# Altium PCB PCB_国产飞控-led端子-copy-copy_2026-03-31.pcbdoc (part 3 of 3)
Units mil, origin at the board's own origin, x right, y up, seen from the top; angles counter-clockwise.
Board outline 3997.5 x 3500.13 mil, 2 copper layers (Top Layer, Bottom Layer); 108 components, 113 nets, 523 pads, 148 vias.
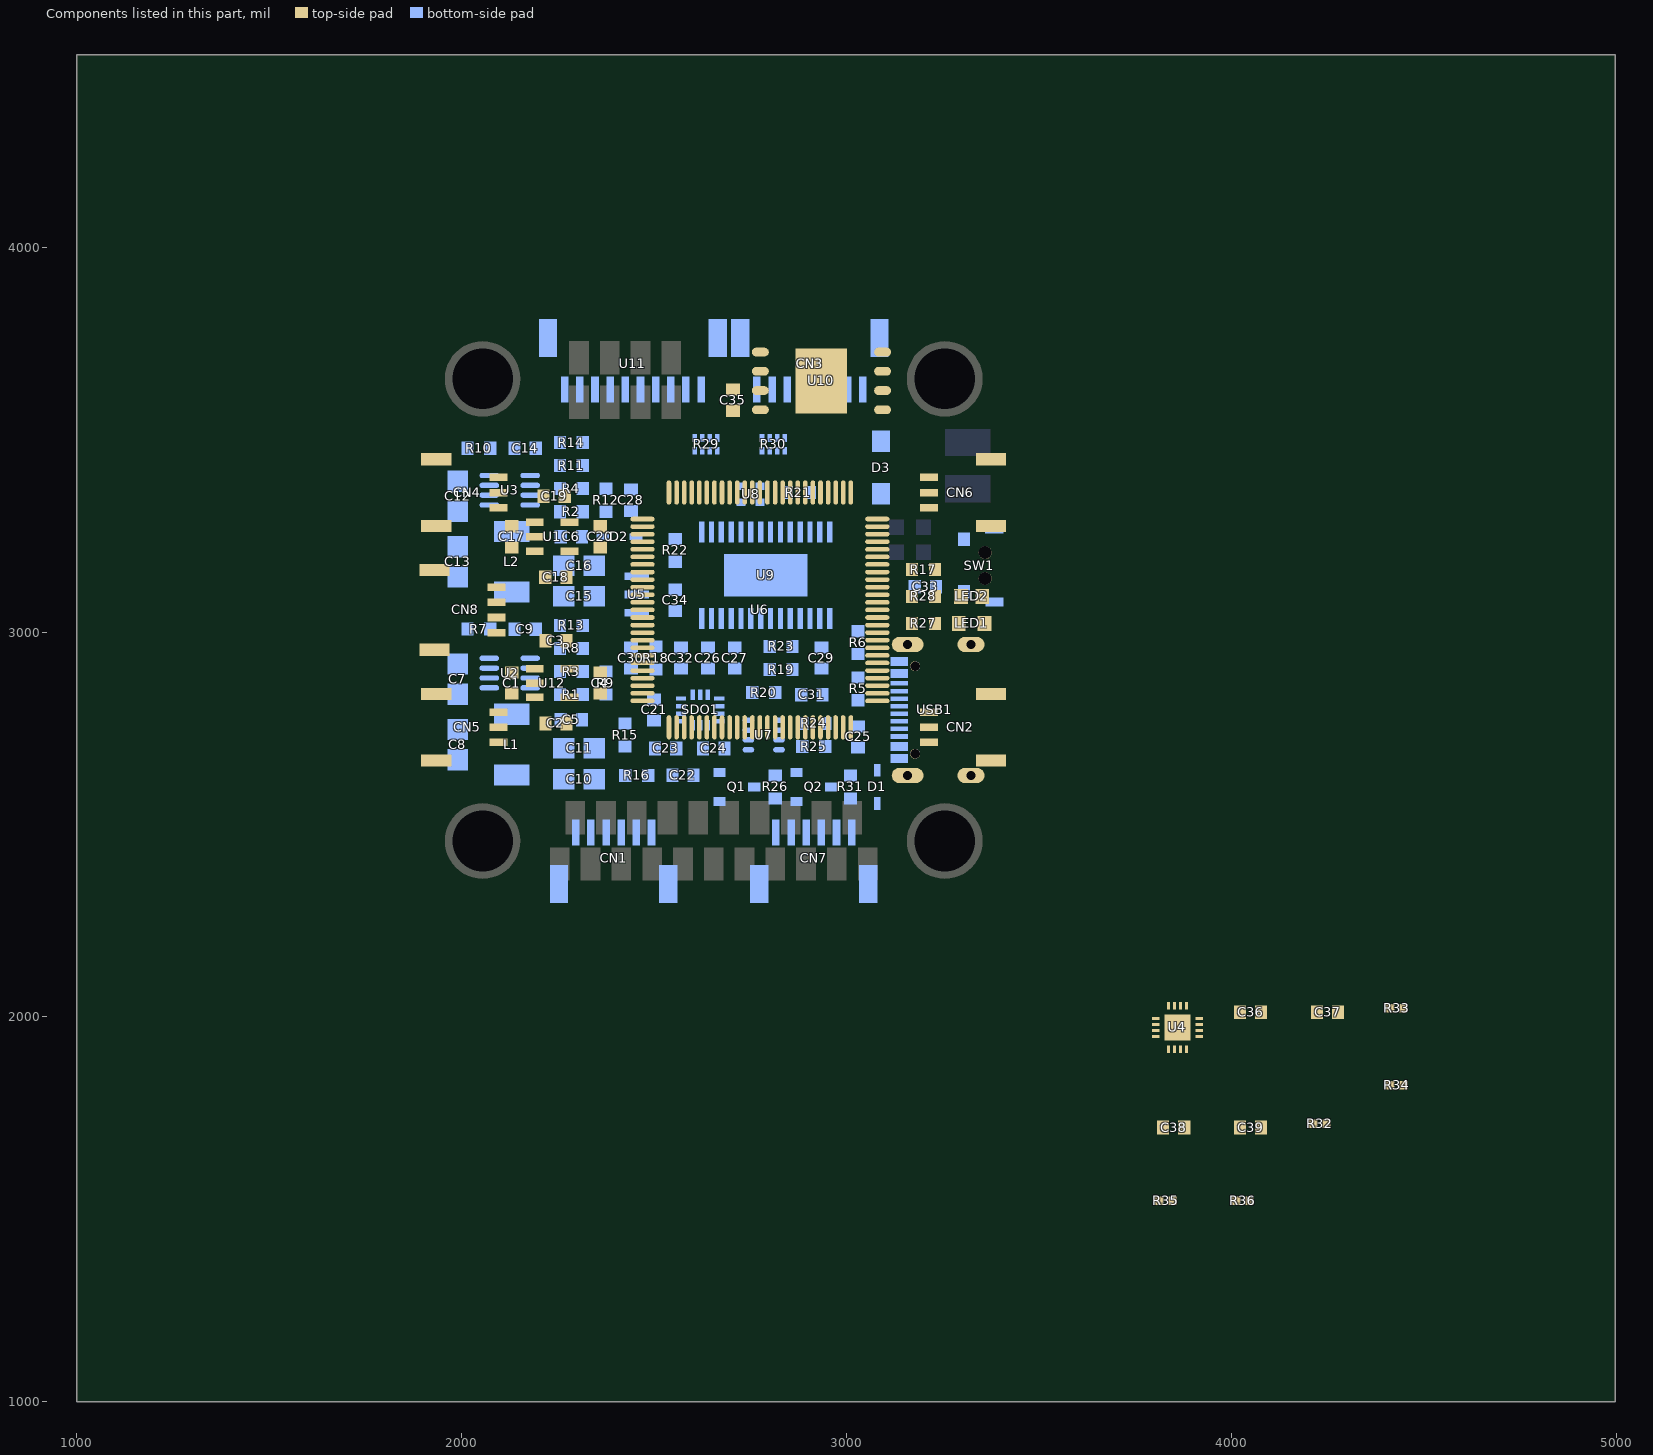
[diagram p3: the components of this part, seen from the top]

## Other copper (continued)
Mid-Layer 2:
  region net SERVO2: 2858.07,3418.48 2858.07,3436.78 2866.62,3432.63 2866.62,3422.63
  region net SERVO1: 2898.07,3458.48 2898.07,3476.78 2906.62,3472.63 2906.62,3462.63
  region net GYRO_EXTI1: 2695.85,2810.7 2714.15,2810.7 2710,2819.25 2700,2819.25
  region net GYRO_EXTI1: 2990.76,3295.45 2977.82,3308.39 2974.71,3299.42 2981.79,3292.34
  region net +10V: 2257.18,2556.87 2244.24,2569.81 2249.43,2573.2 2260.57,2562.06
  region net UART4_RX: 2415.76,2844.81 2402.82,2831.87 2399.71,2840.84 2406.79,2847.92
  region net UART4_RX: 2380.76,3440.45 2367.82,3453.39 2364.71,3444.42 2371.79,3437.34
  region net 3V3-IMU: 2482.18,2768.39 2469.24,2755.45 2478.21,2752.34 2485.29,2759.42
  region net SERVO2: 3037.18,3081.87 3024.24,3094.81 3033.21,3097.92 3040.29,3090.84
  region net SERVO1: 3130.76,3079.81 3117.82,3066.87 3114.71,3075.84 3121.79,3082.92
  region net UART1_RX: 3142.18,3163.39 3129.24,3150.45 3138.21,3147.34 3145.29,3154.42
  region net UART1_TX: 3025.76,3155.45 3012.82,3168.39 3009.71,3159.42 3016.79,3152.34
  region net VBAT_ADC: 2720.76,2629.81 2707.82,2616.87 2706.46,2624.09 2713.54,2631.17
  region net VBAT_ADC: 2462.18,2663.39 2449.24,2650.45 2458.21,2647.34 2465.29,2654.42
  region net CURRENT1: 2760.76,2679.81 2747.82,2666.87 2744.71,2675.84 2751.79,2682.92
  region net CURRENT1: 2298.07,3518.48 2298.07,3536.78 2306.62,3532.63 2306.62,3522.63
  region net +10V: 2248.07,3673.48 2248.07,3691.78 2255,3690.5 2255,3674.76
  region net VDD: 3190.85,3275.7 3209.15,3275.7 3205,3284.25 3195,3284.25
  region net VDD: 3120.85,3694.56 3139.15,3694.56 3135,3686.01 3125,3686.01
  region net LED: 2035.85,3274.56 2054.15,3274.56 2050,3266.01 2040,3266.01
  region net LED: 2035.85,2720.7 2054.15,2720.7 2050,2729.25 2040,2729.25
  region net +5V: 2535.85,3774.56 2554.15,3774.56 2552.87,3766.01 2537.13,3766.01
  region net +5V: 2590.85,3220.7 2609.15,3220.7 2607.87,3229.25 2592.13,3229.25
  region net +5V: 2155.85,2975.7 2174.15,2975.7 2172.87,2984.25 2157.13,2984.25
  region net +5V: 3030.23,3260.75 3011.93,3260.8 3016.06,3269.33 3026.14,3269.3
  region net +5V: 2213.25,3202.16 2231.55,3202.16 2230.27,3193.61 2214.53,3193.61
  region net 3V3-IMU: 2695.76,2679.81 2682.82,2666.87 2679.71,2675.84 2686.79,2682.92
  region net UART1_RX: 2765.85,2589.56 2784.15,2589.56 2780,2581.01 2770,2581.01
  region net UART1_TX: 2626.74,2514.29 2616.84,2529.69 2626.21,2530.92 2631.75,2522.3
  region net UART1_RX: 2707.18,2516.87 2694.24,2529.81 2703.21,2532.92 2710.29,2525.84
Bottom Layer:
  region net BOX_MOSI: 2933.07,3498.48 2933.07,3516.78 2941.62,3512.63 2941.62,3502.63
  region net BOX_MOSI: 2991.93,3498.48 2991.93,3516.78 2983.38,3512.63 2983.38,3502.63
  region net AT_CS: 2790.71,3296.2 2806.87,3304.8 2807.8,3295.62 2797.8,3290.3
  region net AT_CS: 2807.18,3306.87 2794.24,3319.81 2803.21,3322.92 2810.29,3315.84
  region net AT_SCK: 2915.76,3319.81 2902.82,3306.87 2899.71,3315.84 2906.79,3322.92
  region net AT_MISO: 2888.96,3299.34 2870.65,3299.78 2874.6,3291.14 2884.6,3290.9
  region net AT_MOSI: 2838.33,3298.71 2820.11,3300.48 2823.4,3291.57 2833.4,3290.61
  region net BOOT0: 3287.18,3163.39 3274.24,3150.45 3283.21,3147.34 3290.29,3154.42
  region net MOTOR4: 2595.85,3435.7 2614.15,3435.7 2610,3444.25 2600,3444.25
  region net MOTOR3: 2627.94,3429.47 2643.34,3439.37 2635.32,3444.38 2626.71,3438.84
  region net MOTOR2: 2675.76,3439.81 2662.82,3426.87 2659.71,3435.84 2666.79,3442.92
  region net MOTOR1: 2700.85,3435.7 2719.15,3435.7 2715,3442.63 2705,3442.63
  region net SERVO4: 2757.18,3426.87 2744.24,3439.81 2753.21,3442.92 2760.29,3435.84
  region net SERVO3: 2792.18,3426.87 2779.24,3439.81 2788.21,3442.92 2795.29,3435.84
  region net SERVO2: 2845.51,3438.98 2839.3,3421.75 2832.49,3428.06 2836.24,3438.46
  region net SERVO1: 2881.93,3458.48 2881.93,3476.78 2873.38,3472.63 2873.38,3462.63
  region net GYRO_MOSI: 2698.16,2879.69 2688.26,2864.29 2683.25,2872.3 2688.79,2880.92
  region net GYRO_SCK: 2608.7,2862.18 2626.16,2867.69 2625,2858.36 2615,2855.21
  region net GYRO_CS1: 2578.07,2843.48 2578.07,2861.78 2586.62,2857.63 2586.62,2847.63
  region net GYRO_MISO: 2660.85,2844.56 2679.15,2844.56 2675,2836.01 2665,2836.01
  region net GYRO_EXTI2: 2530.85,2864.56 2549.15,2864.56 2545,2856.01 2535,2856.01
  region net GYRO_EXTI1: 2695.85,2794.56 2714.15,2794.56 2710,2786.01 2700,2786.01
  region net D-: 2955.85,3159.56 2974.15,3159.56 2970,3151.01 2960,3151.01
  region net D+: 2980.85,3209.56 2999.15,3209.56 2995,3201.01 2985,3201.01
  region net BB: 2966.93,2588.48 2966.93,2606.78 2960.25,2602.63 2960.25,2592.63
  region net SBUS: 2667.18,2598.39 2654.24,2585.45 2663.21,2582.34 2670.29,2589.42
  region net SBUS: 2646.93,2588.48 2646.93,2606.78 2638.38,2602.63 2638.38,2592.63
  region net +10V: 2257.18,2558.39 2244.24,2545.45 2251.18,2540.31 2262.32,2551.45
  region net +10V: 2235.85,2565.7 2254.15,2565.7 2252.87,2574.25 2237.13,2574.25
  region net UART3_TX: 2415.76,2560.45 2402.82,2573.39 2399.71,2564.42 2406.79,2557.34
  region net UART3_RX: 2486.93,2563.48 2486.93,2581.78 2480,2577.63 2480,2567.63
  region net I2C_SCL: 2835.85,2794.56 2854.15,2794.56 2850,2786.01 2840,2786.01
  region net I2C_SDA: 2775.85,2794.56 2794.15,2794.56 2790,2786.01 2780,2786.01
  region net U6_37: 2735.85,2810.7 2754.15,2810.7 2750,2819.25 2740,2819.25
  region net VBAT: 1938.07,3393.48 1938.07,3411.78 1946.62,3414.44 1946.62,3390.82
  region net VBAT: 1936.3,3392.18 1918.84,3397.69 1913.19,3390.51 1936.81,3383.06
  region net VBAT: 1938.07,3212.88 1938.07,3231.18 1946.62,3233.84 1946.62,3210.22
  region net VBAT: 1936.3,3211.58 1918.84,3217.09 1913.19,3209.91 1936.81,3202.46
  region net VBAT: 1936.3,3232.48 1918.84,3226.97 1913.19,3234.15 1936.81,3241.6
  region net VBAT: 1937.18,2793.39 1924.24,2780.45 1928.4,2772.53 1945.1,2789.23
  region net VBAT: 1915.85,2800.7 1934.15,2800.7 1936.81,2809.25 1913.19,2809.25
  region net VBAT: 2297.18,3403.33 2284.17,3390.45 2291.09,3385.28 2302.29,3396.36
  region net VBAT: 2297.18,2866.93 2284.17,2879.81 2291.09,2884.98 2302.29,2873.9
  region net VBAT: 2383.07,2758.48 2383.07,2776.78 2391.62,2772.63 2391.62,2762.63
  region net +5V: 2773.07,2943.48 2773.07,2961.78 2781.62,2957.63 2781.62,2947.63
  region net +5V: 2765.76,2964.81 2752.82,2951.87 2749.71,2960.84 2756.79,2967.92
  region net HEXT_OUT: 2409.5,3039.97 2406.41,3058.01 2415.52,3055.43 2417.23,3045.43
  region net HEXT_IN: 2407.18,3131.87 2394.24,3144.81 2403.21,3147.92 2410.29,3140.84
  region net U6_14: 2423.07,2998.48 2423.07,3016.78 2431.62,3012.63 2431.62,3002.63
  region net OSD_OUT_VTX: 2862.18,2866.87 2849.24,2879.81 2856.16,2880.87 2863.24,2873.79
  region net UART4_RX: 2370.85,3460.7 2389.15,3460.7 2385,3469.25 2375,3469.25
  region net 3V3-IMU: 2478.07,2758.48 2478.07,2776.78 2486.62,2772.63 2486.62,2762.63
  region net VBAT_ADC: 2462.19,2663.24 2449.08,2650.46 2458.02,2647.24 2465.18,2654.22
  region net VBAT_ADC: 2450.61,2674.82 2437.83,2661.71 2434.61,2670.65 2441.59,2677.81
  region net CURRENT1: 2290.76,3539.81 2277.82,3526.87 2274.71,3535.84 2281.79,3542.92
  region net SWDCLK: 3167.18,3358.39 3154.24,3345.45 3161.46,3344.09 3168.54,3351.17
  region net +5V: 2400.85,3195.7 2419.15,3195.7 2417.87,3204.25 2402.13,3204.25
  region net UART4_RX: 2715.85,3495.7 2734.15,3495.7 2730,3504.25 2720,3504.25
  region net OSD_IN_CAM: 2545.85,3139.56 2564.15,3139.56 2560,3131.01 2550,3131.01
  region net OSD_IN_CAM: 2545.85,3155.7 2564.15,3155.7 2560,3164.25 2550,3164.25
  region net VDD: 3208.07,3258.48 3208.07,3276.78 3216.62,3272.63 3216.62,3262.63
  region net VDD: 3208.07,3258.48 3208.07,3276.78 3216.62,3272.63 3216.62,3262.63
  region net VDD: 2476.93,3353.48 2476.93,3371.78 2468.38,3367.63 2468.38,3357.63
  region net VDD: 3073.16,2739.69 3063.26,2724.29 3058.25,2732.3 3063.79,2740.92
  region net +5V: 2610.45,3206.33 2604.94,3223.79 2614.27,3222.63 2617.42,3212.63
  region net +5V: 2591.93,3203.48 2591.93,3221.78 2583.38,3219.52 2583.38,3205.74
  region net +5V: 3255.85,2744.56 3274.15,2744.56 3272.87,2736.01 3257.13,2736.01
  region net +5V: 3075.76,2505.45 3062.82,2518.39 3057.68,2511.45 3068.82,2500.31
  region net +5V: 3068.7,2528.08 3086.16,2522.57 3087.87,2530.99 3072.13,2535.96
  region net VDD: 2780.85,2689.56 2799.15,2689.56 2795,2682.63 2785,2682.63
  region net VDD: 2780.85,2705.7 2799.15,2705.7 2795,2714.25 2785,2714.25
  region net VDD: 2783.97,2687.02 2780.22,2704.94 2772.69,2699.23 2774.78,2689.23
  region net VDD: 2966.93,2863.48 2966.93,2881.78 2958.38,2877.63 2958.38,2867.63
  region net +5V: 3030.23,3260.75 3011.93,3260.8 3016.1,3269.33 3026.1,3269.3
  region net 3V3-IMU: 2695.76,2679.81 2682.82,2666.87 2679.71,2675.84 2686.79,2682.92
  region net VDD: 2530.85,2919.56 2549.15,2919.56 2545,2911.01 2535,2911.01
  region net BEEPER: 2987.18,2648.39 2974.24,2635.45 2983.21,2632.34 2990.29,2639.42
  region net UART1_RX: 2766.93,2588.48 2766.93,2606.78 2760.2,2602.63 2760.2,2592.63
  region net UART1_RX: 2787.18,2598.39 2774.24,2585.45 2783.21,2582.34 2790.29,2589.42
  region net UART1_TX: 2605.85,2509.56 2624.15,2509.56 2620,2501.01 2610,2501.01
  region net UART1_RX: 2685.85,2509.56 2704.15,2509.56 2700,2501.01 2690,2501.01
  region net I2C_SCL: 2864.34,2509.78 2846.04,2509.34 2850.39,2500.9 2860.39,2501.14
  region net I2C_SDA: 2783.07,2508.48 2783.07,2526.78 2791.62,2522.63 2791.62,2512.63
  region net VBAT: 3255.94,3458.18 3255.94,3527.08 3214.61,3506.41 3214.61,3478.85
  region net SWDCLK: 3180.31,3209.64 3197.99,3227.32 3182.08,3232.62 3175.01,3225.55
  region net VDD: 3219.69,3280.13 3219.69,3255.13 3220,3262.63 3220,3272.63
  region net VDD: 3219.69,3280.13 3219.69,3255.13 3220,3262.63 3220,3272.63
  region net UART1_TX: 2924.84,2446.09 2944.52,2446.09 2939.7,2431.09 2929.7,2431.09
  region net +5V: 3023.26,2459.84 3023.26,2499.21 3036.9,2487.4 3036.9,2471.66
  region net UART1_RX: 2897.64,2446.09 2885.47,2467.93 2879.01,2448.71 2884.07,2439.63
  region net I2C_SCL: 2865.79,2513.02 2846.1,2513.02 2850,2517.51 2860,2517.63
  region net I2C_SDA: 2806.73,2491.01 2818.58,2513.02 2805.09,2519.61 2800.14,2510.42
  region net R13_2: 2298.78,3000.62 2330.53,3000.62 2322.57,2977 2306.83,2977
  region net VBAT: 2407.99,2778.16 2407.99,2755.13 2392.99,2762.63 2392.99,2772.63
  region net VBAT_ADC: 2437.73,2687.1 2412.73,2687.1 2433.16,2672.1 2447.3,2672.1
  region net VDD: 2487.99,2915.43 2487.99,2890.43 2472.99,2897.93 2472.99,2907.93
  region net VDD: 2522.01,2890.43 2522.01,2915.43 2537.01,2907.93 2537.01,2897.93
  region net U6_14: 2487.99,2963.62 2508.33,2978.16 2490.53,2983.87 2482.28,2977.98
  region net U6_37: 2739.47,2825.62 2757.5,2825.62 2750,2810.62 2740,2810.62
  region net MOTOR4: 2611.38,3460.86 2599.57,3460.86 2600,3445.86 2610,3445.86
  region net MOTOR3: 2631.06,3460.86 2619.25,3460.86 2620.2,3447.43 2630.2,3447.43
  region net MOTOR2: 2650.75,3460.86 2638.94,3460.86 2639.8,3457.83 2649.8,3457.83
  region net MOTOR1: 2670.43,3480.74 2670.43,3460.86 2681.8,3465.83 2681.8,3475.83
  region net R29_8: 2599.57,3514.4 2599.57,3494.52 2584.57,3499.43 2584.57,3509.43
  region net R29_7: 2631.06,3514.4 2619.25,3514.4 2620.2,3517.43 2630.2,3517.43
  region net R29_6: 2650.75,3514.4 2638.94,3514.4 2639.8,3529.4 2649.8,3529.4
  region net R29_5: 2670.43,3514.4 2658.62,3514.4 2659.5,3529.4 2669.5,3529.4
  region net SERVO4: 2786.38,3460.86 2774.57,3468.42 2766.24,3455.94 2774.86,3450.42
  region net SERVO3: 2806.06,3460.86 2794.25,3460.86 2795.2,3447.83 2805.2,3447.83
  region net SERVO2: 2825.75,3460.86 2813.94,3460.86 2814.8,3447.83 2824.8,3447.83
  region net SERVO1: 2845.43,3480.13 2845.43,3460.86 2860.43,3462.63 2860.43,3472.63
  region net R30_8: 2786.38,3514.4 2774.57,3514.4 2775.5,3529.4 2785.5,3529.4
  region net R30_7: 2806.06,3514.4 2794.25,3514.4 2795.2,3527.83 2805.2,3527.83
  region net R30_6: 2825.75,3514.4 2813.94,3514.4 2814.8,3517.43 2824.8,3517.43
  region net R30_5: 2845.43,3494.52 2845.43,3514.4 2860.43,3509.43 2860.43,3499.43
  region net VBAT: 3113.62,3468.38 3113.62,3523.49 3154.96,3509.71 3154.96,3482.15
  region net VBAT: 3113.62,3523.49 3066.38,3523.49 3076.22,3564.83 3103.78,3564.83
  region net GYRO_MISO: 2682.5,2832.67 2657.5,2832.67 2665,2847.67 2675,2847.67
  region net GYRO_EXTI1: 2682.97,2762.59 2682.97,2773.61 2695.5,2773.13 2695.5,2763.13
  region net 3V3-IMU: 2645.19,2744.48 2645.19,2764.75 2660.19,2744.35 2660.19,2730.22
  region net 3V3-IMU: 2557.03,2773.61 2557.03,2762.59 2542.03,2763.13 2542.03,2773.13
  region net GYRO_EXTI2: 2557.03,2793.3 2557.03,2782.28 2554.8,2782.83 2554.8,2792.83
  region net GYRO_CS1: 2594.8,2838.73 2605.82,2850.78 2598.54,2856.17 2591.62,2848.94
  region net GYRO_SCK: 2625.51,2850.78 2614.49,2850.78 2615,2865.78 2625,2865.78
  region net GYRO_MOSI: 2645.19,2850.78 2634.17,2850.78 2634.7,2857.33 2644.7,2857.33
  region net 3V3-IMU: 2514.9,2715.35 2489.9,2715.35 2497.4,2730.35 2507.4,2730.35
  region net 3V3-IMU: 2670.22,2679.91 2695.22,2679.91 2698.54,2671.17 2687.93,2667.63
  region net 3V3-IMU: 2694.68,2715.35 2669.68,2715.35 2660.07,2730.35 2674.23,2730.35
  region net UART1_RX: 2776,2609.13 2776,2585.83 2791,2574.56 2791,2588.7
  region net SBUS: 2657.3,2572.03 2682.3,2572.03 2674.8,2582.83 2664.8,2582.83
  region net Q2_1: 2885.5,2572.03 2885.5,2548.43 2900.5,2555.23 2900.5,2565.23
  region net HEXT_OUT: 2423.5,3060.27 2423.5,3040.59 2408.5,3045.43 2408.5,3055.43
  region net HEXT_IN: 2423.5,3154.67 2423.5,3134.99 2408.5,3139.83 2408.5,3149.83
  region net U9_6: 2785.59,3328.1 2763.78,3340.32 2757.33,3326.74 2766.4,3321.66
  region net U9_5: 2736.3,3369.44 2714.57,3381.8 2708.18,3368.18 2717.19,3363.05
  region net +5V: 2667.95,3232.27 2681.73,3232.27 2679.8,3227.43 2669.8,3227.43
  region net U9_5: 2732.91,3287.39 2719.13,3287.39 2721,3296.63 2731,3296.63
  region net U9_6: 2758.5,3287.39 2744.72,3287.39 2746.6,3302.39 2756.6,3302.39
  region net AT_CS: 2809.69,3287.39 2795.91,3287.39 2797.8,3299.83 2807.8,3299.83
  region net AT_MOSI: 2835.28,3287.39 2821.5,3287.39 2823.4,3302.39 2833.4,3302.39
  region net AT_SCK: 2860.87,3287.39 2847.09,3287.39 2849,3302.39 2859,3302.39
  region net AT_MISO: 2886.46,3287.39 2872.68,3287.39 2874.6,3302.39 2884.6,3302.39
  region net C26_2: 2667.95,3007.86 2681.73,3007.86 2679.8,2995.03 2669.8,2995.03
  region net C27_2: 2693.54,3007.86 2707.32,3007.86 2705.4,2992.86 2695.4,2992.86
  region net +5V: 2719.13,3007.86 2732.91,3007.86 2731,2996.63 2721,2996.63
  region net U9_22: 2784.1,3062.98 2770.32,3062.98 2772.2,3065.43 2782.2,3065.43
  region net +5V: 2795.91,3007.86 2809.69,3007.86 2807.8,2992.86 2797.8,2992.86
  region net U9_19: 2847.09,3007.86 2860.87,3007.86 2859,2992.86 2849,2992.86
  region net C26_2: 2635.88,2975.94 2657.72,2963.77 2664.18,2977.34 2655.1,2982.4
  region net C27_1: 2657.72,2892.53 2657.72,2917.53 2672.72,2910.03 2672.72,2900.03
  region net C27_2: 2712.9,2975.94 2692.28,2975.94 2695.4,2990.94 2705.4,2990.94
  region net C27_1: 2692.28,2917.53 2692.28,2892.53 2677.28,2900.03 2677.28,2910.03
  region net C27_1: 2727.72,2890.13 2727.72,2915.13 2742.72,2907.63 2742.72,2897.63
  region net OSD_IN_CAM: 2567.5,3125.94 2542.5,3125.94 2550,3140.94 2560,3140.94
  region net U9_22: 2551.01,3070.82 2572.72,3058.42 2579.09,3072.05 2570.09,3077.19
  region net OSD_OUT_VTX: 2847.2,2885.62 2872.2,2885.62 2864.7,2877.33 2854.7,2877.33
  region net C27_1: 2784.47,2890.13 2784.47,2915.13 2769.47,2907.63 2769.47,2897.63
  region net AT_CS: 2853.18,3345.62 2829.47,3353.56 2820.91,3340.61 2831.5,3337.06
  region net +5V: 2920.53,3375.13 2920.53,3350.13 2935.53,3357.63 2935.53,3367.63
  region net OSD_IN_CAM: 2542.5,3167.1 2567.5,3167.1 2560,3152.1 2550,3152.1
  region net +5V: 2815.3,2979.64 2790.3,2979.64 2797.8,2994.64 2807.8,2994.64
  region net +5V: 2784.47,2965.13 2784.47,2945.62 2769.47,2947.63 2769.47,2957.63
  region net U9_19: 2843.78,2979.64 2866.5,2979.64 2859,2994.64 2849,2994.64
  region net VDD: 2827.5,2643.16 2802.5,2643.16 2810,2657.63 2820,2657.63
  region net UART1_RX: 2797.99,2562.14 2797.99,2583.85 2782.99,2596.71 2782.99,2582.57
  region net Q2_1: 2992.99,2572.73 2992.99,2552.1 2977.99,2555.23 2977.99,2565.23
  region net BEEPER: 2992.99,2617.14 2992.99,2642.14 2977.99,2651.71 2977.99,2637.57
  region net +5V: 3071.04,2537.79 3088.96,2537.79 3087.87,2522.63 3072.13,2522.63
  region net +5V: 3081.82,2571.06 3088.96,2537.79 3106.29,2569.59 3102.36,2587.92
  region net VBUS: 3071.04,2657.47 3088.96,2657.47 3087.87,2672.63 3072.13,2672.63
  region net VBAT_ADC: 2531.69,2640.13 2531.69,2615.13 2516.69,2622.63 2516.69,2632.63
  region net VDD: 3047.72,2739.44 3047.72,2762.41 3062.72,2741.98 3062.72,2727.84
  region net VDD: 2457.72,3354.44 2457.72,3375.13 2472.72,3367.63 2472.72,3357.63
  region net VDD: 2925.1,2889.32 2950.1,2889.32 2942.6,2874.32 2932.6,2874.32
  region net VDD: 2457.72,2890.43 2457.72,2915.43 2472.72,2907.93 2472.72,2897.93
  region net VDD: 2950.1,2855.35 2925.1,2855.35 2932.6,2870.35 2942.6,2870.35
  region net VDD: 2925.1,2819.91 2950.1,2819.91 2942.6,2804.91 2932.6,2804.91
  region net VDD: 2552.28,2915.43 2552.28,2890.43 2537.28,2897.93 2537.28,2907.93
  region net VBAT_ADC: 2500.53,2615.13 2500.53,2640.13 2515.53,2632.63 2515.53,2622.63
  region net VBAT_ADC: 2468.78,2624.48 2483.57,2644.64 2469.11,2650.29 2463.13,2642.13
  region net VDD: 2950.1,2779.64 2928.78,2779.64 2932.6,2794.64 2942.6,2794.64
  region net VDD: 2932.2,2745.62 2957.2,2745.62 2949.7,2730.62 2939.7,2730.62
  region net I2C_SCL: 2869.47,2758.53 2869.47,2779.64 2854.47,2776.03 2854.47,2766.03
  region net VDD: 2957.2,2719.64 2932.2,2719.64 2939.7,2734.64 2949.7,2734.64
  region net I2C_SDA: 2869.47,2699.3 2884.01,2719.64 2869.65,2725.35 2863.76,2717.1
  region net U3_2: 2121.69,3495.35 2121.69,3459.91 2098.07,3469.76 2098.07,3485.5
  region net U3_2: 2121.69,3459.91 2153.19,3459.91 2142.87,3436.29 2127.13,3436.29
  region net U3_6: 2241.69,3265.35 2241.69,3229.91 2218.07,3239.76 2218.07,3255.5
  region net C6_1: 2328.31,3265.35 2296.81,3265.35 2304.73,3288.97 2320.47,3288.97
  region net VBAT: 2016.57,3364.25 2016.57,3401.11 2040.2,3389.3 2040.2,3373.55
  region net VBAT: 1963.43,3419.76 1963.43,3373.1 1927.99,3390.82 1927.99,3414.44
  region net VBAT: 1963.43,3249.76 1963.43,3194.25 1930,3210.22 1930,3233.84
  region net R12_2: 2262.76,3119.2 2293.38,3094.46 2302.01,3117.86 2289.69,3127.82
  region net R12_2: 2237.87,3119.2 2237.87,3066.06 2202.44,3080.82 2202.44,3104.44
  region net R12_2: 2372.13,3199.2 2340.32,3199.2 2352.13,3222.83 2367.87,3222.83
  region net R12_2: 2349.84,3146.06 2316.62,3167.17 2307.12,3145.22 2320.73,3136.57
  region net C6_1: 2298.78,3295.62 2330.53,3295.62 2320.47,3272 2304.73,3272
  region net U3_4: 2239.47,3299.03 2264.23,3329.64 2243.27,3335.8 2232.72,3324.07
  region net VBAT: 2298.78,3359.47 2324.08,3389.64 2300.45,3398.22 2290.28,3386.1
  region net U3_3: 2264.23,3355.62 2239.47,3386.23 2233.52,3361.99 2244.07,3350.26
  region net U3_8: 2031.22,3491.03 2006.22,3460.62 2029.75,3452.05 2039.8,3464.27
  region net U3_2: 2090.53,3494.64 2090.53,3460.62 2114.15,3469.76 2114.15,3485.5
  region net R11_2: 2330.53,3449.64 2298.78,3449.64 2306.83,3473.26 2322.57,3473.26
  region net R11_2: 2330.53,3446.23 2305.77,3415.62 2329.19,3407.01 2339.14,3419.32
  region net U3_1: 2264.23,3415.62 2239.47,3446.23 2230.86,3419.32 2240.81,3407.01
  region net R12_2: 2357.99,3297.1 2392.01,3297.1 2382.87,3273.48 2367.13,3273.48
  region net R11_2: 2357.99,3363.4 2388.6,3388.16 2361.69,3396.77 2349.38,3386.82
  region net R11_2: 2298.78,3475.62 2330.53,3475.62 2322.57,3452 2306.83,3452
  region net L1_1: 2149.68,2813.93 2110.32,2813.93 2122.13,2837.55 2137.87,2837.55
  region net L1_1: 2176.26,2758.81 2176.26,2792.32 2199.88,2780.5 2199.88,2764.76
  region net +10V: 2176.26,2601.33 2176.26,2647.16 2211.69,2629.44 2211.69,2605.82
  region net BOOT0: 3317.61,3122.73 3292.61,3122.73 3300.11,3132.52 3310.11,3132.52
  region net VDD: 3289.4,3253.31 3289.4,3228.31 3274.4,3235.81 3274.4,3245.81
  region net VBUS: 3130.1,2703.15 3159.23,2698.32 3167.03,2702.08 3153.17,2709.59
  region net DP: 3113.96,2774 3113.96,2762.19 3098.96,2763.13 3098.96,2773.13
  region net DN: 3159.23,2781.88 3159.23,2793.69 3164.8,2792.83 3164.8,2782.83
  region net DN: 3113.96,2793.69 3113.96,2781.88 3098.96,2782.83 3098.96,2792.83
  region net DP: 3113.96,2813.37 3113.96,2801.56 3105.2,2802.43 3105.2,2812.43
  region net DN: 3159.23,2821.25 3159.23,2833.06 3165.5,2832.13 3165.5,2822.13
  region net VBUS: 3159.23,2896.19 3129.99,2892.11 3154.53,2884.58 3168.57,2891.72
  region net UART3_RX: 2404.84,2513.02 2424.52,2506.68 2433.87,2519.42 2423.17,2522.87
  region net SBUS: 2491.43,2513.02 2503.26,2491 2509.86,2510.42 2504.92,2519.62
  region net UART3_TX: 2385.15,2513.02 2365.47,2513.02 2370.3,2528.02 2380.3,2528.02
  region net +10V: 2286.73,2493.03 2306.42,2513.02 2286.9,2526.87 2275.85,2515.65
  region net UART4_RX: 2796.73,3597.24 2816.42,3597.24 2811.6,3594.23 2801.6,3594.23
  region net R30_8: 2836.1,3597.24 2855.79,3597.24 2850.9,3588.53 2840.9,3588.53
  region net R30_7: 2875.47,3597.24 2895.16,3597.24 2890.3,3587.93 2880.3,3587.93
  region net R30_6: 2914.84,3597.24 2934.53,3597.24 2929.7,3587.33 2919.7,3587.33
  region net R30_5: 2954.21,3597.24 2973.9,3597.24 2969.1,3586.73 2959.1,3586.73
  region net +5V: 2469.84,3238.67 2436.57,3245.81 2419.71,3225.27 2438.04,3221.34
  region net R12_2: 2379.68,3238.67 2350.16,3238.67 2352.13,3215.05 2367.87,3215.05
  region net R12_2: 2355.32,3256.59 2383.43,3256.59 2382.87,3280.21 2367.13,3280.21
  region net U3_6: 2176.3,3233.83 2176.3,3267.32 2199.92,3255.5 2199.92,3239.76
  region net U3_6: 2149.68,3288.93 2110.32,3288.93 2122.13,3312.55 2137.87,3312.55
  region net R12_2: 2176.3,3076.33 2176.3,3122.16 2211.73,3104.44 2211.73,3080.82
  region net L1_1: 2241.69,2790.35 2241.69,2754.91 2218.07,2764.76 2218.07,2780.5
  region net R1_2: 2328.31,2790.35 2296.81,2790.35 2306.83,2813.97 2322.57,2813.97
  region net VBAT: 2016.57,2889.25 2016.57,2926.11 2040.2,2914.3 2040.2,2898.55
  region net VBAT: 1963.43,2944.76 1963.43,2889.25 1935,2905.22 1935,2928.84
  region net VBAT: 1963.43,2774.76 1963.43,2724.68 1927.99,2772.93 1927.99,2806.34
  region net R7_1: 2121.69,3025.35 2121.69,2989.91 2098.07,2999.76 2098.07,3015.5
  region net R7_1: 2121.69,2989.91 2153.19,2989.91 2145.27,2966.29 2129.53,2966.29
  region net +10V: 2262.76,2644.2 2293.38,2619.46 2302.01,2642.86 2289.69,2652.82
  region net +10V: 2237.87,2644.2 2237.87,2591.06 2202.44,2605.82 2202.44,2629.44
  region net +10V: 2364.08,2724.2 2324.71,2724.2 2336.53,2747.83 2352.27,2747.83
  region net +10V: 2349.84,2671.06 2316.62,2692.17 2307.12,2670.22 2320.73,2661.57
  region net R1_2: 2298.78,2820.62 2330.53,2820.62 2322.57,2797 2306.83,2797
  region net R1_1: 2239.47,2824.03 2264.23,2854.64 2243.27,2860.8 2232.72,2849.07
  region net VBAT: 2324.08,2880.62 2298.78,2910.79 2290.28,2884.16 2300.45,2872.04
  region net R3_1: 2264.23,2880.62 2239.47,2911.23 2233.52,2886.99 2244.07,2875.26
  region net D-: 3012.99,2883.62 3033.33,2898.16 3015.53,2903.87 3007.28,2897.98
  region net DN: 3047.01,2835.43 3047.01,2810.43 3049.7,2817.93 3049.7,2827.93
  region net D+: 3042.5,3018.16 3017.5,3018.16 3025,3033.16 3035,3033.16
  region net DP: 3047.01,2941.64 3026.67,2927.1 3044.47,2921.39 3052.72,2927.28
  region net R7_2: 2031.22,3021.03 2006.22,2990.62 2029.75,2982.05 2039.8,2994.27
  region net R7_1: 2090.53,3024.64 2090.53,2990.62 2114.15,2999.76 2114.15,3015.5
  region net R13_2: 2330.53,2974.64 2298.78,2974.64 2306.83,2998.26 2322.57,2998.26
  region net R13_2: 2330.53,2971.23 2305.77,2940.62 2329.19,2932.01 2339.14,2944.32
  region net R8_1: 2264.23,2940.62 2239.47,2971.23 2230.86,2944.32 2240.81,2932.01
  region net +10V: 2388.6,2822.1 2357.99,2846.86 2349.38,2823.44 2361.69,2813.49
  region net R13_2: 2357.99,2888.4 2388.6,2913.16 2361.69,2921.77 2349.38,2911.82
  region net 3V3-IMU: 2482.28,2780.13 2482.28,2755.13 2470,2762.63 2470,2772.63
  region net 3V3-IMU: 2517.72,2755.63 2517.72,2780.63 2532.72,2773.13 2532.72,2763.13
  region net 3V3-IMU: 2489.9,2754.32 2514.9,2754.32 2507.4,2739.32 2497.4,2739.32
  region net R29_8: 2336.73,3597.23 2356.42,3597.23 2351.6,3582.23 2341.6,3582.23
  region net UART4_RX: 2297.36,3597.23 2317.05,3597.23 2312.2,3582.23 2302.2,3582.23
  region net CURRENT1: 2257.99,3597.23 2277.68,3597.23 2272.8,3582.23 2262.8,3582.23
  region net R29_7: 2376.1,3597.23 2395.79,3597.23 2390.9,3582.23 2380.9,3582.23
  region net R29_6: 2415.47,3597.23 2435.16,3597.23 2430.3,3587.33 2420.3,3587.33
  region net R29_5: 2454.84,3597.23 2474.53,3597.23 2469.7,3587.93 2459.7,3587.93
  region net VDD: 2753.24,2701.4 2753.23,2687.07 2768.23,2689.23 2768.24,2699.23
  region net VDD: 2753.23,2738.26 2753.23,2752.6 2767.2,2750.43 2767.2,2740.43
  region net I2C_SCL: 2832.65,2763.86 2832.64,2778.19 2847.64,2776.03 2847.65,2766.03
  region net I2C_SDA: 2832.64,2738.26 2832.64,2752.6 2842.5,2750.43 2842.5,2740.43
  region net I2C_SDA: 2816.78,2738.26 2816.78,2752.6 2801.78,2750.43 2801.78,2740.43
  region net VDD: 2816.78,2712.67 2816.77,2727.01 2801.77,2724.83 2801.78,2714.83
  region net R7_2: 2053.2,2938.92 2090.6,2938.92 2079.77,2951.03 2064.03,2951.03
  region net U3_8: 2053.2,3413.92 2090.6,3413.92 2079.77,3421.03 2064.03,3421.03

## Silkscreen, mask and mechanical layers (free items; w line width, h text height)
Top Overlay:
  region: 2360,3152.63 2360,3047.63 2310,2992.63
  region: 2360,3152.63 2360,3047.63 2410,2992.63
  lines w3.94 net S$147824: 2123.44,2984.19 2123.44,3131.69 ; 2130,2687.63 2130,2792.63 ; 2130,3322.63 2130,3427.63 ; 2225,2572.63 3100,2572.63 ; 2250,2622.63 3045,2622.63 ; 2282.5,3542.63 2567.5,3542.63 ; 2285,3492.63 2570,3492.63 ; 3180,2702.63 3180,2807.63 ; 3180,3307.63 3180,3412.63
  lines w3.94 net S$288220: 3315,3172.63 3345,3172.63 ; 3325,2907.63 3355,2907.63
  lines w3.94 net S$288224: 3330,3162.63 3335,3162.63 3339.8,3167.43 3345,3172.63 ; 3340,2897.63 3345,2897.63 3349.8,2902.43 3355,2907.63
  lines w3.94 net S$288228: 3330,3182.63 3335,3182.63 3345,3172.63 ; 3340,2917.63 3345,2917.63 3355,2907.63
  lines w31.5: 1897.13,2457.24 1897.13,3658.02 cw(c2054.61,3658.02) 2054.61,3815.5 3255.39,3815.5 cw(c3255.39,3658.02) 3412.87,3658.02 3412.87,2457.24 cw(c3255.39,2457.24) 3255.39,2299.76 2054.61,2299.76 cw(c2054.61,2457.24) 1897.13,2457.24
  text "10V" at 2335,3546.02 h26.77 r180
  text "CAM" at 2425,3546.02 h26.77 r180
  text "GND" at 2505,3546.02 h26.77 r180
  text "5V" at 2565,3546.02 h26.77 r180
  text "R4" at 2325,3496.02 h26.77 r180
  text "T4" at 2410,3496.02 h26.77 r180
  text "GND" at 2505,3496.02 h26.77 r180
  text "5V" at 2565,3496.02 h26.77 r180
  text "SHEEPFINDER" at 2660,3472.63 h59.05
  text "G 5 L" at 2126.61,3427.63 h26.77 r270
  text "V1.1   2024.1" at 2725,3407.63 h59.05
  text "G 5 L" at 3183.39,3307.63 h26.77 r90
  text "MCU" at 2216.92,3287.63 h26.77 r270
  text "BOOT" at 3230,3186.88 h31.5
  text "AT32F435" at 2580,3182.63 h78.74
  text "T" at 2142.73,3123.49 h26.77 r72
  text "U" at 2173.39,3112.63 h26.77 r90
  text "A" at 2173.39,3092.63 h26.77 r90
  text "R" at 2143,3088.02 h26.77 r90
  text "R" at 2173.39,3067.63 h26.77 r90
  text "G" at 2142.61,3048.41 h26.77 r90
  text "T" at 2172.73,3043.49 h26.77 r72
  text "8" at 2173.39,3027.63 h26.77 r90
  text "5" at 2142.61,3008.41 h26.77 r90
  text "IMU" at 2221.31,2892.63 h26.77 r270
  text "USB" at 3235,2876.88 h31.5
  text "JLCJLCJLCJLC" at 2585,2812.95 h39.37
  text "G 5 L" at 2126.61,2792.63 h26.77 r270
  text "G 5 L" at 3183.39,2702.63 h26.77 r90
  text "VTX" at 2260,2619.24 h26.77
  text "5V" at 2355,2619.24 h26.77
  text "T2" at 2425,2619.24 h26.77
  text "R2" at 2505,2619.24 h26.77
  text "T1" at 2585,2619.24 h26.77
  text "R1" at 2660,2619.24 h26.77
  text "SDA" at 2725,2619.24 h26.77
  text "SCL" at 2815,2619.24 h26.77
  text "GND" at 2900,2619.24 h26.77
  text "5V" at 3000,2619.24 h26.77
  text "10V" at 2225,2569.24 h26.77
  text "GND" at 2300,2569.24 h26.77
  text "T3" at 2390,2569.24 h26.77
  text "R3" at 2465,2569.24 h26.77
  text "GND" at 2535,2569.24 h26.77
  text "5V" at 2625,2569.24 h26.77
  text "SBUS" at 2685,2569.24 h26.77
  text "5V" at 2800,2569.24 h26.77
  text "LED" at 2865,2569.24 h26.77
  text "BB-" at 2945,2569.24 h26.77
  text "BB+" at 3035,2569.24 h26.77
Bottom Overlay:
  lines w3.94 net S$244950: 2590,2337.63 2640,2337.63 ; 2670,2417.63 2720,2417.63
  lines w3.94 net S$244954: 2595,2327.63 2590,2327.63 2580,2337.63 2590,2347.63 2595,2347.63 ; 2715,2407.63 2720,2407.63 2730,2417.63 2720,2427.63 2715,2427.63
  lines w3.94 net S$288280: 3100,3302.63 3165,3302.63 3175,3292.63
  lines w3.94 net S$288284: 3100,3177.63 3165,3177.63 3175,3187.63
  lines w3.94 net S$288288: 3105,3247.63 3120,3247.63 3125,3252.63
  lines w3.94 net S$288292: 3105,3232.63 3120,3232.63 3125,3227.63
  lines w31.5: 1897.13,2457.24 1897.13,3658.02 cw(c2054.61,3658.02) 2054.61,3815.5 3255.39,3815.5 cw(c3255.39,3658.02) 3412.87,3658.02 3412.87,2457.24 cw(c3255.39,2457.24) 3255.39,2299.76 2054.61,2299.76 cw(c2054.61,2457.24) 1897.13,2457.24
  text "GND" at 2533.39,3592.63 h26.77 r90
  text "GND" at 2573.39,3592.63 h26.77 r90
  text "BAT" at 2613.39,3592.63 h26.77 r90
  text "BAT" at 2653.39,3592.63 h26.77 r90
  text "GND" at 3033.39,3592.63 h26.77 r90
  text "BAT" at 3073.39,3592.63 h26.77 r90
  text "CC" at 2293.39,3587.63 h26.77 r90
  text "R4" at 2333.39,3587.63 h26.77 r90
  text "M4" at 2373.39,3587.63 h26.77 r90
  text "M3" at 2413.39,3587.63 h26.77 r90
  text "M2" at 2453.39,3587.63 h26.77 r90
  text "M1" at 2493.39,3587.63 h26.77 r90
  text "NC" at 2793.39,3587.63 h26.77 r90
  text "R4" at 2833.39,3587.63 h26.77 r90
  text "S4" at 2873.39,3587.63 h26.77 r90
  text "S3" at 2913.39,3587.63 h26.77 r90
  text "S2" at 2953.39,3587.63 h26.77 r90
  text "S1" at 2993.39,3587.63 h26.77 r90
  text "-" at 3235,3438.06 h70.87 r180
  text "+" at 3204.95,3432.58 h70.87 r315
  text "3.3" at 3090,3264.24 h26.77
  text "GND" at 3095,3229.24 h26.77
  text "IO" at 3062.87,3213.29 h26.77 r245
  text "5V" at 2158.39,3202.63 h26.77 r90
  text "CLK" at 3095,3159.24 h26.77
  text "10V" at 2158.39,2737.63 h26.77 r90
  text "V" at 2285.2,2505.13 h26.77 r339
  text "T" at 2385.86,2504.9 h26.77 r342
  text "0" at 2305,2504.24 h26.77
  text "1" at 2315,2504.24 h26.77
  text "G" at 2345,2504.24 h26.77
  text "3" at 2375,2504.24 h26.77
  text "3" at 2415,2504.24 h26.77
  text "R" at 2430,2504.24 h26.77
  text "G" at 2465,2504.24 h26.77
  text "S" at 2495,2504.24 h26.77
  text "S" at 2515,2504.24 h26.77
  text "V" at 2789.8,2470.13 h26.77 r21
  text "D" at 2610,2469.24 h26.77
  text "C" at 2640,2469.24 h26.77
  text "1" at 2660,2469.24 h26.77
  text "R" at 2680,2469.24 h26.77
  text "1" at 2705,2469.24 h26.77
  text "T" at 2725,2469.24 h26.77
  text "G" at 2755,2469.24 h26.77
  text "5" at 2800,2469.24 h26.77
  text "GPS" at 2735,2424.24 h26.77
  text "DJI" at 2635,2339.24 h26.77